# Altium PCB Arduino_FPGA_Shield.PcbDoc (part 1 of 2)
Units mil, origin at the board's own origin, x right, y up, seen from the top; angles counter-clockwise.
Board outline 2700 x 2100 mil, 4 copper layers (Top, PWR, GND, Bottom), stack 79.645 mil thick; 88 components, 145 nets, 490 pads, 201 vias.
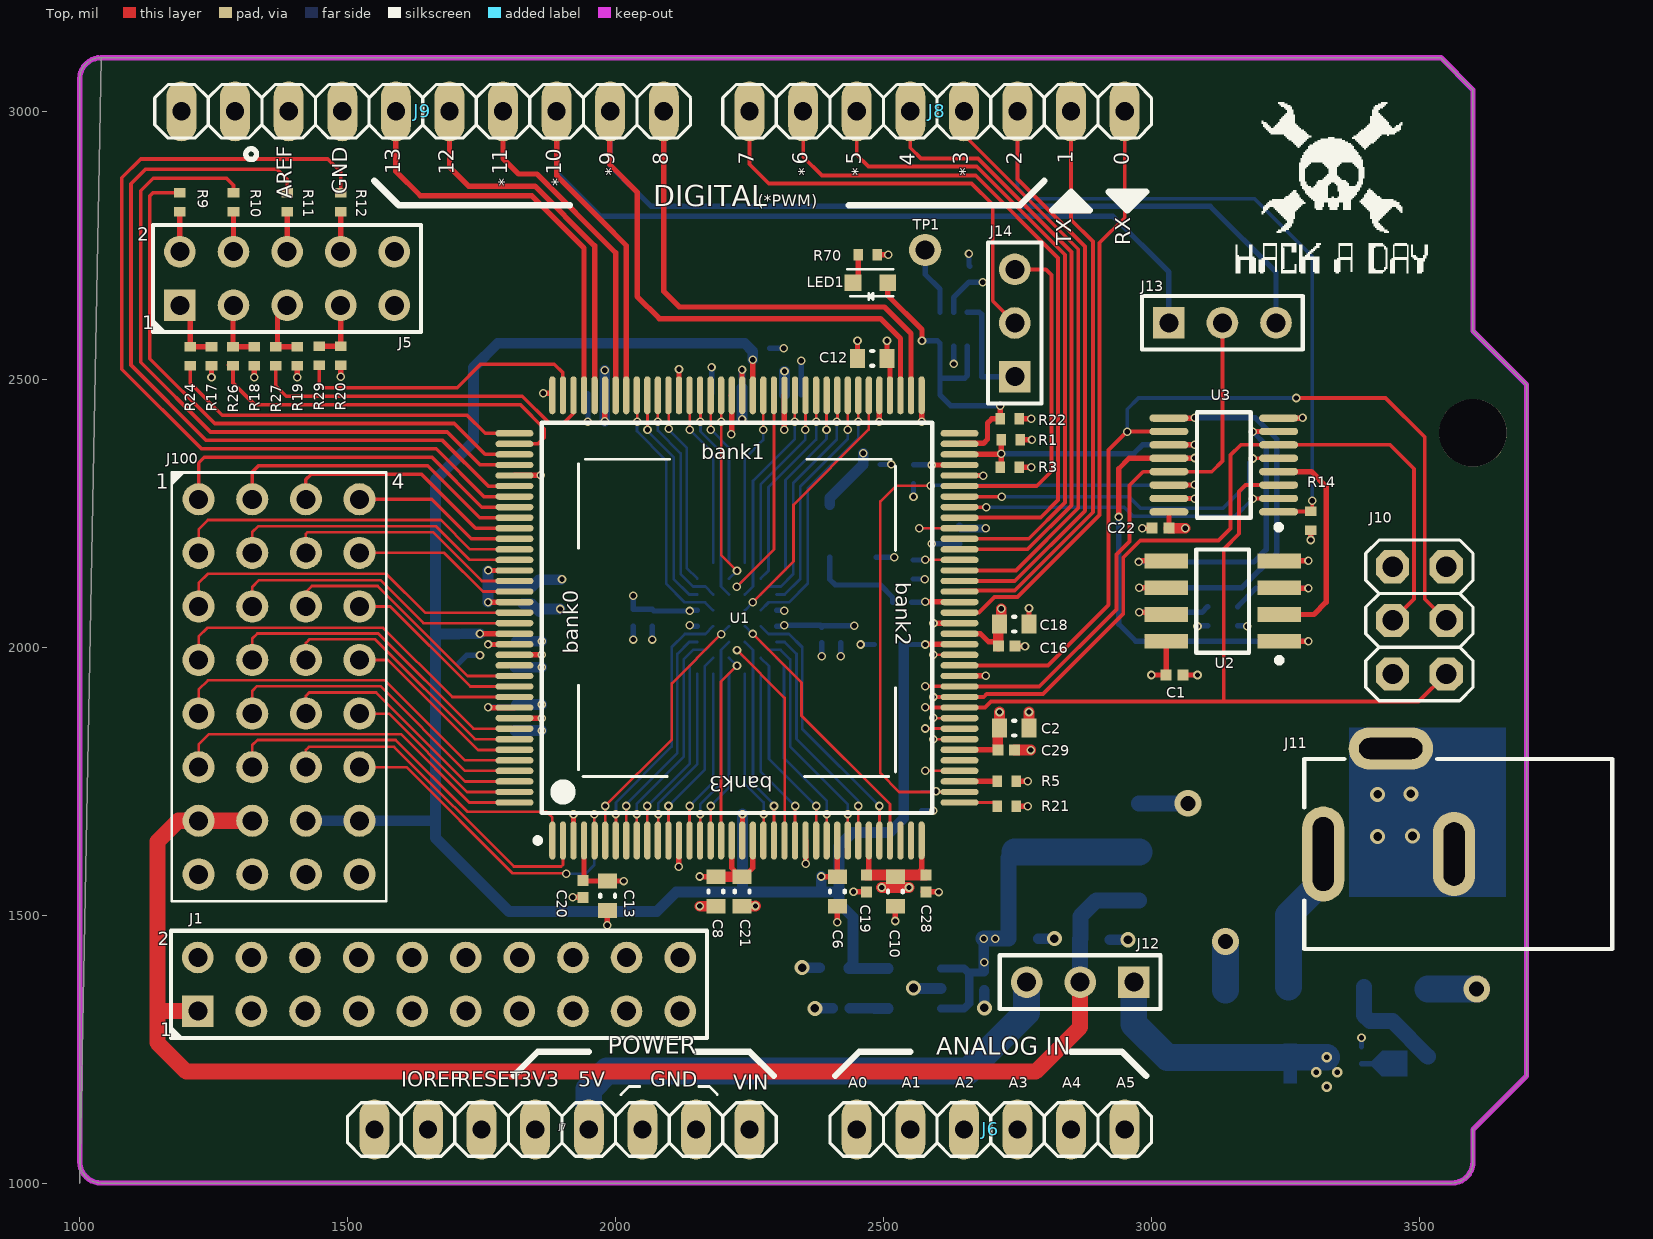
[diagram p0: Top view]
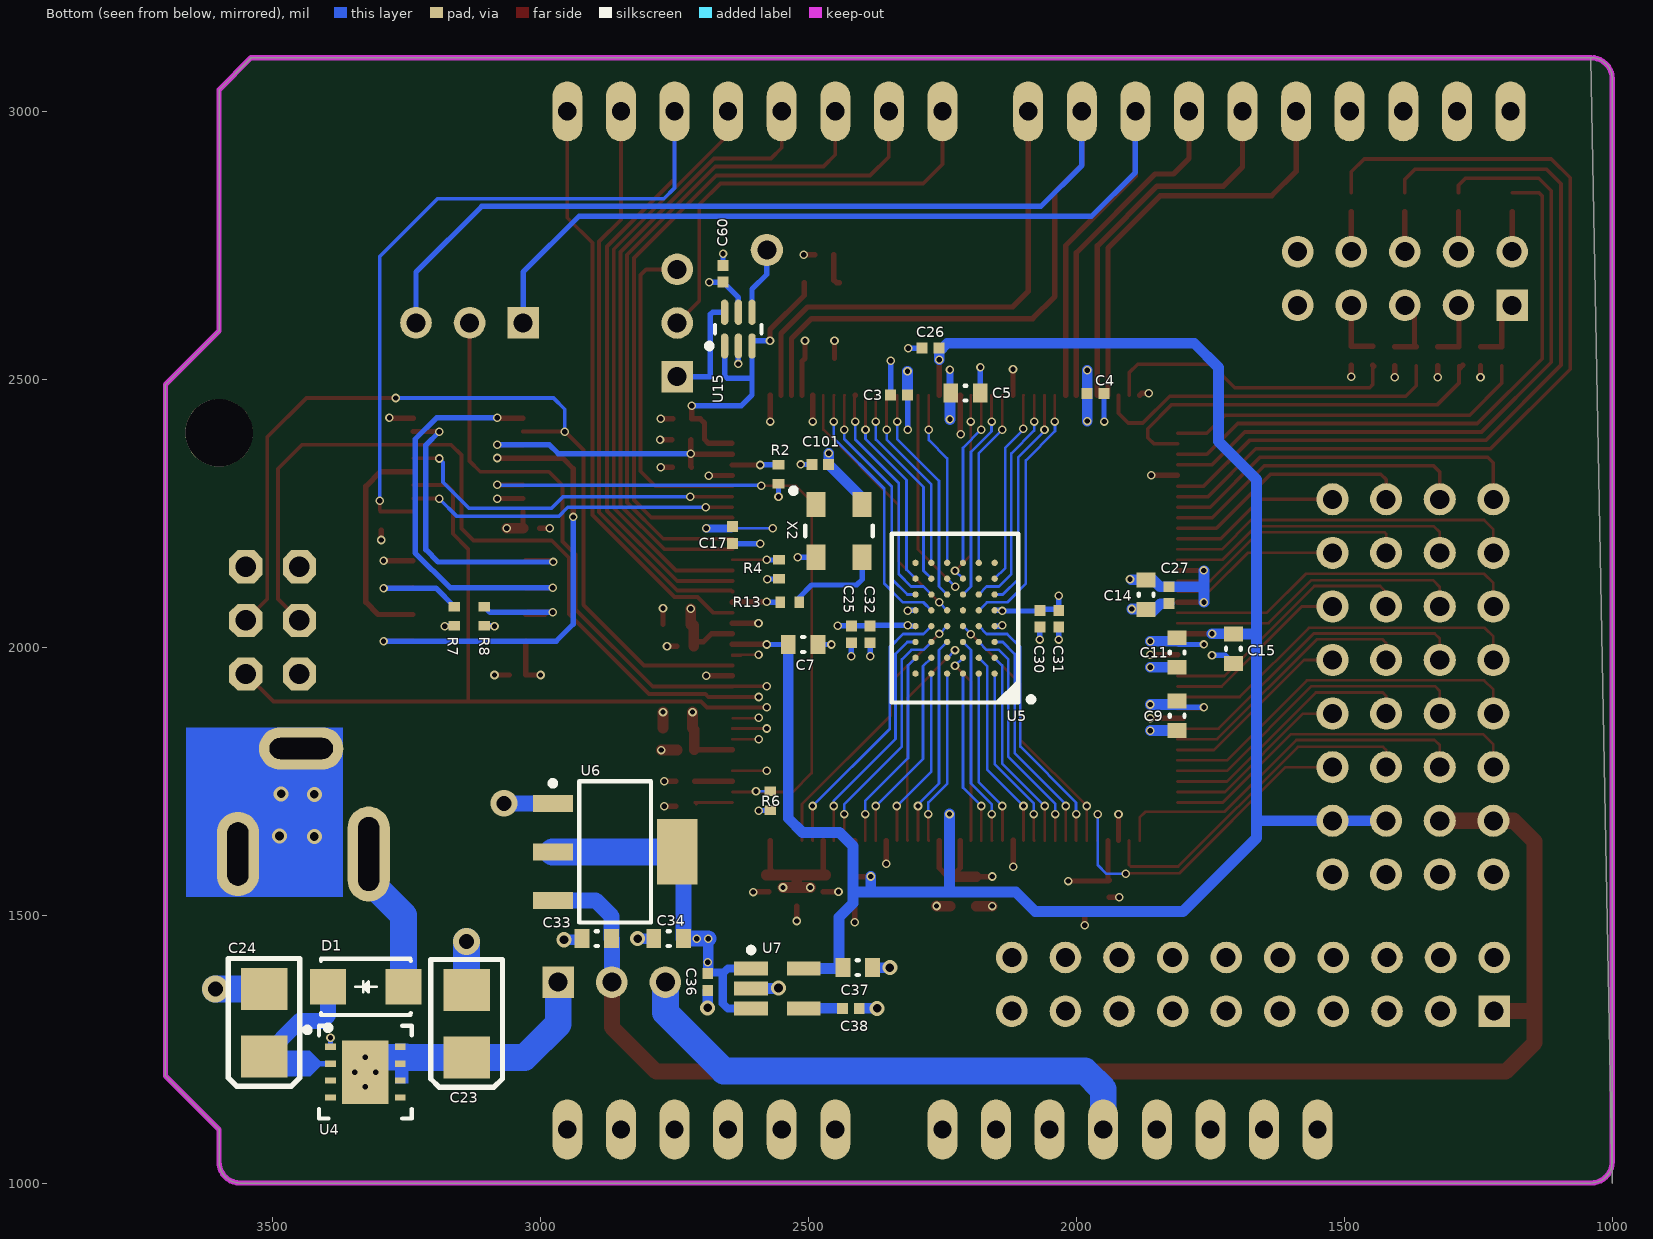
[diagram p1: Bottom view, seen from below]
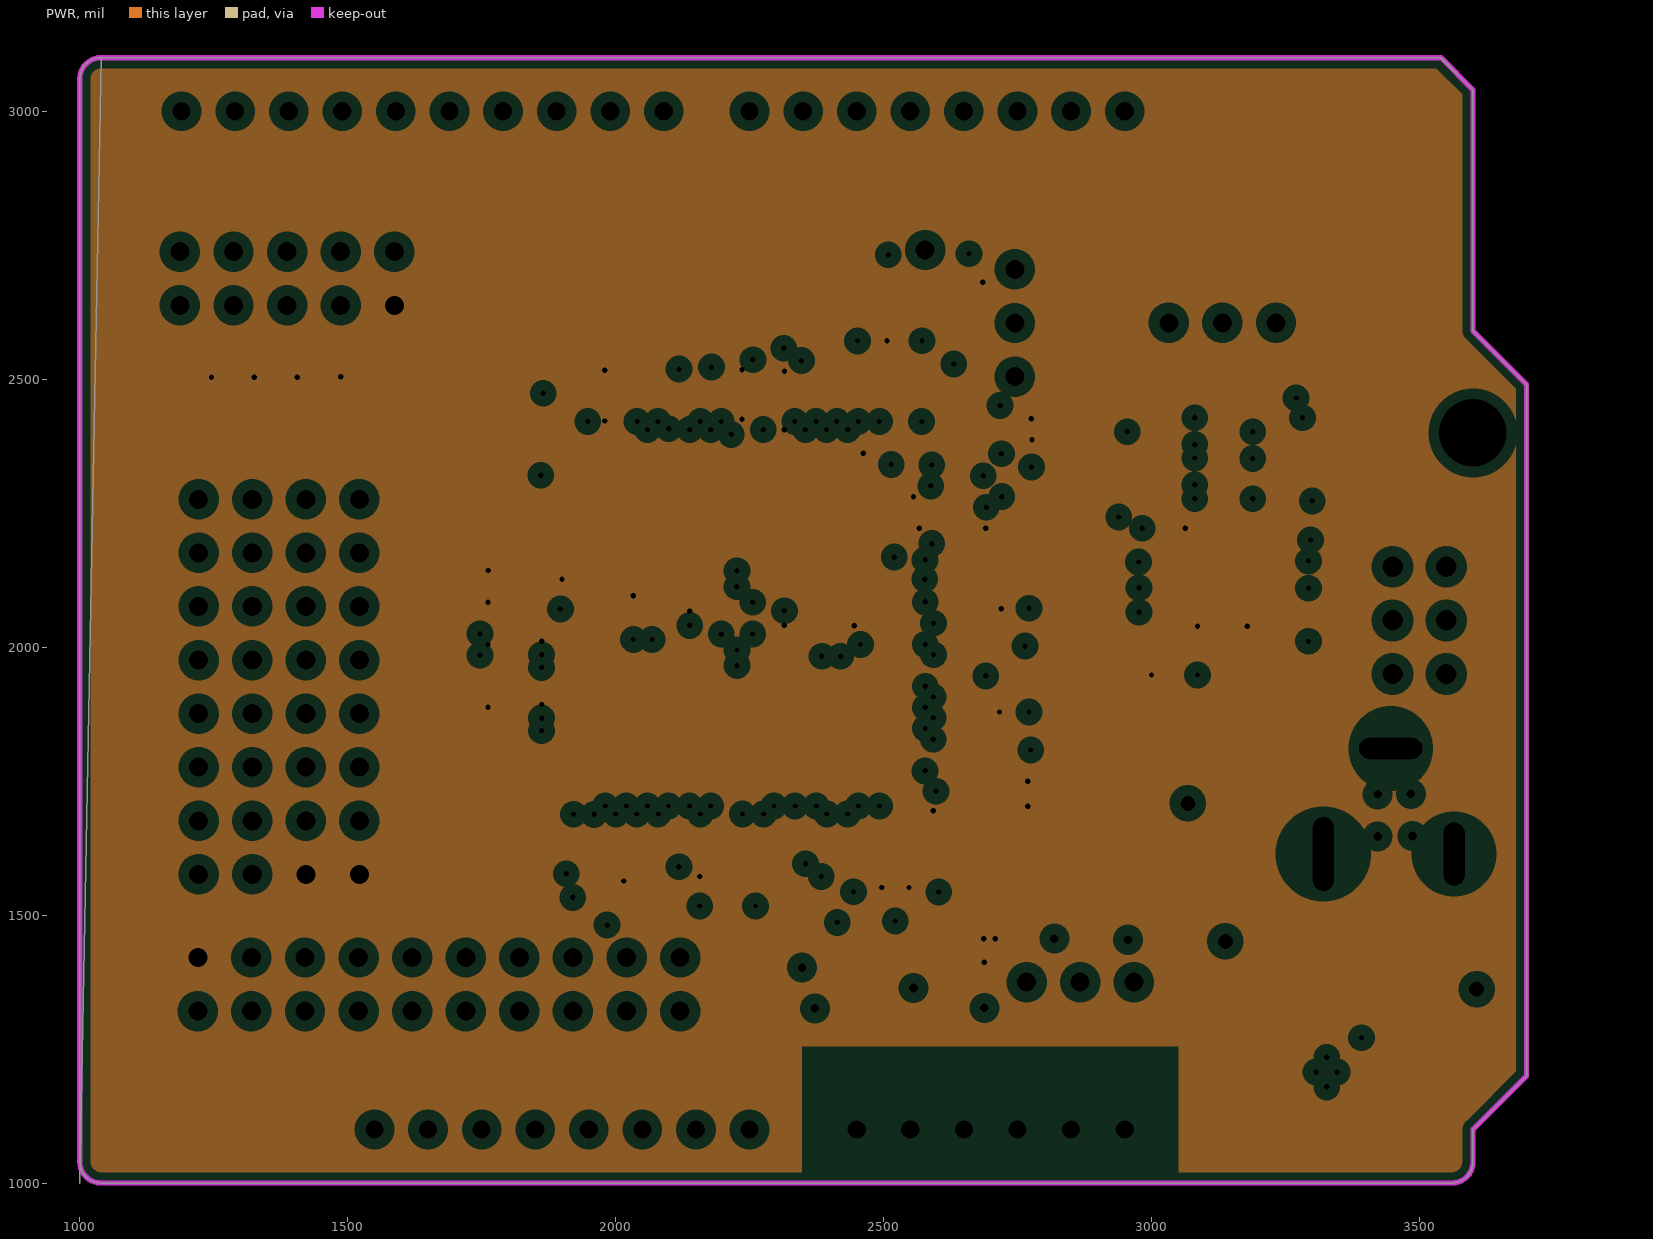
[diagram p2: PWR, clearances drawn from the general rule]
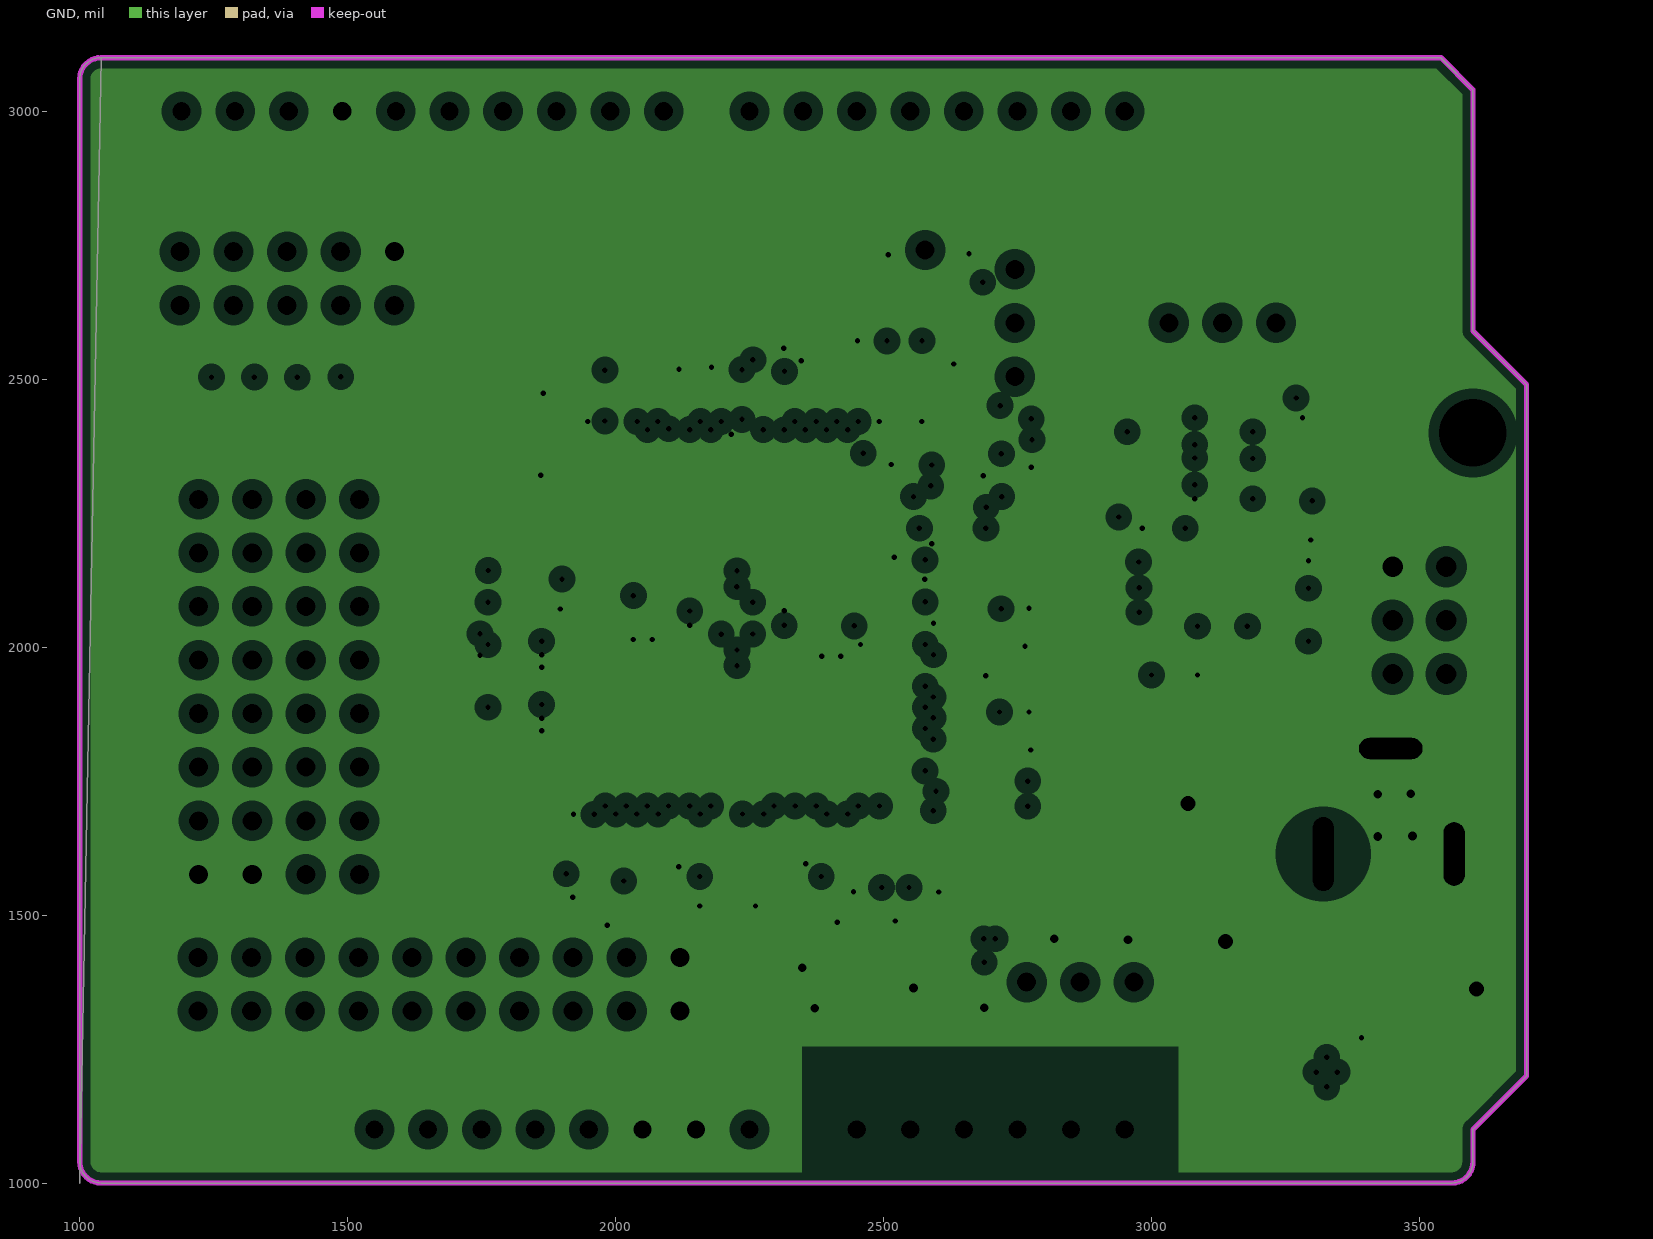
[diagram p3: GND, clearances drawn from the general rule]

## Layer stack, top to bottom
Top Solder: solder mask 0.4, Solder Resist, Dk 3.5
Top: signal copper 1.378
Dielectric 1: core 59.055, FR-4, Dk 4.8
PWR: plane copper 1.417, net 3V3
Dielectric 4: prepreg 5, Dk 4.2
GND: plane copper 1.417, net GND
Dielectric 2: core 10, Dk 4.2
Bottom: signal copper 1.378
Bottom Solder: solder mask 0.4, Solder Resist, Dk 3.5

## Board outline
1040,3100 3540,3100 3600,3040 3600,2590 3700,2490 3700,1200 3600,1100 3600,1040 cw(c3560.5,1039.5) 3561,1000 1040,1000 cw(c1040,1040) 1000,1040 1000,3061 cw(c1039.5,3060.5) 1000,1000

## Design rules (kind name [scope] priority, off if disabled: settings)
Clearance [All] p1: gap=5.39
HoleSize [All] p1: absolutevalues=TRUE maxlimit=100000 minlimit=7 maxpercent=80.000 minpercent=20.000
HoleToHoleClearance [All] p1: gap=8 allowstackedmicrovias=TRUE
MinimumSolderMaskSliver [All] p1 off: minsoldermaskwidth=10
PasteMaskExpansion [All] p1: expansion=2
PlaneClearance [All] p1: clearance=20
PlaneConnect PlaneConnect_1 [IsVia And (AsMM(ViaDiameter) = 0.405)] p1: planeconnectstyle=NoConnect reliefexpansion=20 reliefentries=4 reliefconductorwidth=10 reliefairgap=10
PlaneConnect [All] p2: planeconnectstyle=Relief reliefexpansion=20 reliefentries=4 reliefconductorwidth=10 reliefairgap=10
PolygonConnect ThermalVias [IsVia] p1: connectstyle=Direct reliefconductorwidth=10 reliefentries=4 polygonreliefangle="90 Angle" airgapwidth=10
PolygonConnect [All] p2: connectstyle=Relief reliefconductorwidth=10 reliefentries=4 polygonreliefangle="90 Angle" airgapwidth=10
RoutingVias [All] p1: holewidth=10 width=16 viastyle="Through Hole" minholewidth=10 minwidth=16 maxholewidth=28 maxwidth=48
SilkToBoardRegionClearance [All] p1 off:
SilkToSilkClearance [All] p1 off: silktosilkclearance=10
SilkToSolderMaskClearance [IsPad] p1 off: minsilkscreentomaskgap=10 clearancetoexposedcopper=TRUE
SolderMaskExpansion [All] p1: expansion=1
Width POWER [InNetClass('POWER')] p1: maxlimit=100 minlimit=10 preferedwidth=10
Width [All] p2: maxlimit=100 minlimit=5 preferedwidth=5
20 further rules are at their usual default settings.

## Classes and differential pairs
component class LEDS: C60 LED1 R70 U15
component class "Power - 1V2": C36 C37 C38 U7
component class "ARDUINO FPGA DESIGN": C101 R13 R14 X2
component class FPGA_SUBSYSTEM: R1 R2 R3 R4 R5 R6 R9 R10 R11 R12 R17 R18 R19 R20 R21 R22 R24 R26 R27 R29 U1
component class "U_FPGA - Decoupling": C2 C3 C4 C5 C6 C7 C8 C9 C10 C11 C12 C13 C14 C15 C16 C17 C18 C19 C20 C21 C26 C27 C28 C29
component class "Arduino FPGA Top-Level Interface": J1 J5 J6 J7 J8 J9 J10 J13 J14 J100 TP1
component class POWER: C23 C24 D1 J11 J12 U4
component class FLASH_MEMORY: C1 R7 R8 U2
component class "SPI MUX": C22 U3
component class SRAM0: C25 C30 C31 C32 U5
net class SRAM0_A[17..0]: SRAM0_A0 SRAM0_A1 SRAM0_A2 SRAM0_A3 SRAM0_A4 SRAM0_A5 SRAM0_A6 SRAM0_A7 SRAM0_A8 SRAM0_A9 SRAM0_A10 SRAM0_A11 SRAM0_A12 SRAM0_A13 SRAM0_A14 SRAM0_A15 SRAM0_A16 SRAM0_A17
net class SRAM0_D[15..0]: SRAM0_D0 SRAM0_D1 SRAM0_D2 SRAM0_D3 SRAM0_D4 SRAM0_D5 SRAM0_D6 SRAM0_D7 SRAM0_D8 SRAM0_D9 SRAM0_D10 SRAM0_D11 SRAM0_D12 SRAM0_D13 SRAM0_D14 SRAM0_D15
component class "Power - 3V3": C33 C34 U6

## Components (designator, comment, footprint, x,y, rotation, side; value= is the part's Value field where it differs from the comment)
C1 "CAP 100nF 16V 0402(1005)" CAPC0402(1005)60_L 3043,1948 r0 top
C2 "CAP 4.7uF 10V 0603(1608)" CAPC0603(1608)55_L 2744,1849 r0 top
C3 "CAP 470nF 10V 0402(1005)" CAPC0402(1005)60_L 2331,2471 r180 bottom
C4 "CAP 470nF 10V 0402(1005)" CAPC0402(1005)60_L 1964.25,2473.35 r0 bottom
C5 "CAP 4.7uF 10V 0603(1608)" CAPC0603(1608)55_L 2207,2474 r180 bottom
C6 "CAP 4.7uF 10V 0603(1608)" CAPC0603(1608)55_L 2414,1544 r270 top
C7 "CAP 4.7uF 10V 0603(1608)" CAPC0603(1608)55_L 2510,2005 r180 bottom
C8 "CAP 4.7uF 10V 0603(1608)" CAPC0603(1608)55_L 2187,1544 r270 top
C9 "CAP 4.7uF 10V 0603(1608)" CAPC0603(1608)55_L 1812,1872 r270 bottom
C10 "CAP 4.7uF 10V 0603(1608)" CAPC0603(1608)55_L 2522,1544 r270 top
C11 "CAP 4.7uF 10V 0603(1608)" CAPC0603(1608)55_L 1812,1990 r270 bottom
C12 "CAP 4.7uF 10V 0603(1608)" CAPC0603(1608)55_L 2479,2539 r180 top
C13 "CAP 4.7uF 10V 0603(1608)" CAPC0603(1608)55_L 1985,1536 r270 top
C14 "CAP 4.7uF 10V 0603(1608)" CAPC0603(1608)55_L 1870,2098 r90 bottom
C15 "CAP 4.7uF 10V 0603(1608)" CAPC0603(1608)55_L 1707,1997 r270 bottom
C16 "CAP 470nF 10V 0402(1005)" CAPC0402(1005)60_L 2730,2002 r180 top
C17 "CAP 470nF 10V 0402(1005)" CAPC0402(1005)60_L 2642,2209 r90 bottom
C18 "CAP 4.7uF 10V 0603(1608)" CAPC0603(1608)55_L 2744,2043 r180 top
C19 "CAP 470nF 10V 0402(1005)" CAPC0402(1005)60_L 2468,1559 r90 top
C20 "CAP 470nF 10V 0402(1005)" CAPC0402(1005)60_L 1939,1549 r90 top
C21 "CAP 4.7uF 10V 0603(1608)" CAPC0603(1608)55_L 2236,1544 r90 top
C22 "CAP 100nF 16V 0402(1005)" CAPC0402(1005)60_L 3017,2222 r180 top
C23 "TAJB106K020R" AVX-CAPC3528_V 3138,1297 r90 bottom
C24 "TAJB106K020R" AVX-CAPC3528_V 3516,1299 r90 bottom
C25 "CAP 100nF 16V 0402(1005)" CAPC0402(1005)60_L 2420,2024 r270 bottom
C26 "CAP 470nF 10V 0402(1005)" CAPC0402(1005)60_L 2272,2558 r0 bottom
C27 "CAP 470nF 10V 0402(1005)" CAPC0402(1005)60_L 1827,2097 r270 bottom
C28 "CAP 470nF 10V 0402(1005)" CAPC0402(1005)60_L 2579,1559 r90 top
C29 "CAP 470nF 10V 0402(1005)" CAPC0402(1005)60_L 2729,1808 r180 top
C30 "CAP 100nF 16V 0402(1005)" CAPC0402(1005)60_L 2068,2053 r270 bottom
C31 "CAP 10nF 16V 0402(1005)" CAPC0402(1005)33_L 2033,2053 r270 bottom
C32 "CAP 10nF 16V 0402(1005)" CAPC0402(1005)33_L 2385,2024 r270 bottom
C33 "CAP 4.7uF 10V 0603(1608)" CAPC0603(1608)55_L 2895,1456 r0 bottom
C34 "CAP 4.7uF 10V 0603(1608)" CAPC0603(1608)55_L 2761,1456 r0 bottom
C36 "CAP 1uF 16V 0402(1005)" CAPC0402(1005)60_L 2688,1375 r90 bottom
C37 "CAP 2.2uF 16V 0603(1608)" CAPC0603(1608)55_L 2408,1402 r0 bottom
C38 "CAP 10nF 16V 0402(1005)" CAPC0402(1005)33_L 2421,1326 r0 bottom
C60 "CAP 100nF 10V 0402(1005)" CAPC0402(1005)60_L 2659.45,2696.85 r270 bottom
C101 "CAP 100nF 16V 0402(1005)" CAPC0402(1005)60_L 2478,2341 r0 bottom
D1 "S1G" DO-214AC 3326,1366 r0 bottom
J1 "Header 10X2" HEADER_10X2 1220.47,1318.9 r0 top
J5 "Header 5X2" HDR2X5 1187,2638 r0 top
J6 "Header 6" 1X06 2700,1100 r0 top
J7 "Header 8" 1X08 1900,1100 r0 top
J8 "Header 8" 1X08 2600,3000 r180 top
J9 "Header 10" 1X10@1 1640,3000 r180 top
J10 "Header 3X2" 2X03 3500,2050 r90 top
J11 "PWR CONNECTOR" KLD-0202 3860,1614 r180 top
J12 "3-WAY JUMPER" HDR1X3 2967,1375 r180 top
J13 "3-WAY JUMPER" HDR1X3 3032.48,2605.32 r0 top
J14 "3-WAY JUMPER" HDR1X3 2745.08,2504.92 r90 top (schematic designator J13)
J100 "ARR_32P" ARR_100X100X32P 1222,2276 r0 top
LED1 "LED_GREEN_APT1608SGC" LED0603 2507.87,2680.12 r180 top
R1 "100R 1 0402" RESC0402(1005)40_L 2737,2387 r0 top
R2 "4K7 1 0402" RESC0402(1005)40_L 2556,2323 r270 bottom
R3 "100R 1 0402" RESC0402(1005)40_L 2736,2336 r180 top
R4 "1K 1 0402" RESC0402(1005)40_L 2555,2145 r90 bottom
R5 "4K7 1 0402" RESC0402(1005)40_L 2730,1750 r0 top
R6 "4K7 1 0402" RESC0402(1005)40_L 2571,1713 r270 bottom
R7 "4K7" RESC0402(1005)40_L 3161,2058 r270 bottom
R8 "4K7" RESC0402(1005)40_L 3105,2058 r270 bottom
R9 "33R 1 0402" RESC0402(1005)40_L 1187,2830 r90 top
R10 "33R 1 0402" RESC0402(1005)40_L 1287,2830 r90 top
R11 "33R 1 0402" RESC0402(1005)40_L 1387,2830 r90 top
R12 "33R 1 0402" RESC0402(1005)40_L 1487,2830 r90 top
R13 "33R 1 0402" RESC0402(1005)40_L 2535,2084 r180 bottom
R14 "4K7 1 0402" RESC0402(1005)40_L 3297,2236 r90 top
R17 "4K7 1 0402" RESC0402(1005)40_L 1246,2543 r270 top
R18 "4K7 1 0402" RESC0402(1005)40_L 1326,2543 r270 top
R19 "4K7 1 0402" RESC0402(1005)40_L 1406,2542.72 r270 top
R20 "4K7 1 0402" RESC0402(1005)40_L 1487,2543.72 r270 top
R21 "4K7 1 0402" RESC0402(1005)40_L 2730,1703 r0 top
R22 "330R 1 0402" RESC0402(1005)40_L 2735.72,2426 r0 top
R24 "33R 1 0402" RESC0402(1005)40_L 1206,2543 r270 top
R26 "33R 1 0402" RESC0402(1005)40_L 1286,2543 r270 top
R27 "33R 1 0402" RESC0402(1005)40_L 1366,2542.72 r270 top
R29 "33R 1 0402" RESC0402(1005)40_L 1447,2543.72 r270 top
R70 "56R 1% 0402(1005)" RESC0402(1005)_L 2470.47,2732.28 r0 top
TP1 "TESTPOINT_TH" TESTPOINT_TH 2577.76,2741.14 r0 top
U1 "XC6SLX9-2TQG144C" TQG144_N 2226.59,2054.59 r90 top
U2 "S25FL216K0PMFI041" SPANSION-SOIC127P600X175-8M 3133,2086 r180 top
U3 "SN74CBTLV3257DBQR" TI-DBQ16_N 3135,2340 r180 top
U4 "LM1086ILD-3.3/NOPB" LDC08A 3327,1207 r180 bottom
U5 "IS61WV12816DBLL-10BLI" ISSI-TF-BGA-48-6000X8000DE 2226.47,2054 r0 bottom
U6 "AP2114H-3.3TRG1" SOT230P700X180-4L 2861,1618 r180 bottom
U7 "CAT6219-125TDGT3" ONSC-SOT23-5_M 2558,1363 r180 bottom
U15 "SN74LVC2G34DCKR" TI-DCK6_L 2630.91,2593.5 r90 bottom
X2 "KC5032A20.0000CM0E00" HOSC-L500HW320H105-4_2 2443,2217 r270 bottom

## Footprints (in the part's own frame and the unit in brackets; to place one, negate y for a bottom-side part, rotate by r counter-clockwise, add the part's x,y. Pads: shape width x height; smd on the part's side, far side on the other; paste and mask are expansions set on the pad)
1X06 [mil] "1X06"
  oval 56x112 hole 34: 1(-250,0) 2(-150,0) 3(-50,0) 4(50,0) 5(150,0) 6(250,0)
  silkscreen extent -300,-50 300,50
1X08 [mil] "1X08"
  oval 56x112 hole 34: 1(-350,0) 2(-250,0) 3(-150,0) 4(-50,0) 5(50,0) 6(150,0) 7(250,0) 8(350,0)
  silkscreen extent -400,-50 400,50
1X10@1 [mil] "1X10@1"
  oval 56x112 hole 34: 1(-450,0) 2(-350,0) 3(-250,0) 4(-150,0) 5(-50,0) 6(50,0) 7(150,0) 8(250,0) 9(350,0) 10(450,0)
  silkscreen extent -500,-50 500,50
2X03 [mil] "2X03"
  oct 62x62 hole 38: 1(-100,-50) 2(-100,50) 3(0,-50) 4(0,50) 5(100,-50) 6(100,50)
  silkscreen extent -150,-100 150,100
ARR_100X100X32P [mil] "100X100mil 32 PIN ARRAY OF PADS"
  round 60 hole 35.5: 1(0,0) 2(100,0) 3(200,0) 4(300,0) 5(0,-100) 6(100,-100) 7(200,-100) 8(300,-100) 9(0,-200) 10(100,-200) 11(200,-200) 12(300,-200) 13(0,-300) 14(100,-300) 15(200,-300) 16(300,-300) 17(0,-400) 18(100,-400) 19(200,-400) 20(300,-400) 21(0,-500) 22(100,-500) 23(200,-500) 24(300,-500) 25(0,-600) 26(100,-600) 27(200,-600) 28(300,-600) 29(0,-700) 30(100,-700) 31(200,-700) 32(300,-700)
  silkscreen extent -50,-750 350,50
AVX-CAPC3528_V [mm] "SMT Capacitor, 2 Leads, Body 3.5x2.8mm"
  rect 2x2.2 smd: 1(-1.6,0) 2(1.6,0)
  silkscreen extent -3,-1.7 3.05,1.7, body extent -1.79,-1.54 1.8,1.54, height 1.9
CAPC0402(1005)33_L [mm] "Chip Capacitor, Body 1.0x0.5mm, Height 0.33mm, IPC High Density"
  rect 0.52x0.52 smd: 1(-0.4,0) 2(0.4,0)
  body extent -0.55,-0.3 0.55,0.3, height 0.33
CAPC0402(1005)60_L [mm] "Chip Capacitor, Body 1.0x0.5mm, Height 0.6mm, IPC High Density"
  rect 0.52x0.52 smd: 1(-0.4,0) 2(0.4,0)
  body extent -0.55,-0.3 0.55,0.3, height 0.6
CAPC0603(1608)55_L [mm] "Chip Capacitor, Body 1.6x0.8mm, Height 0.55mm, IPC High Density"
  rect 0.7x0.9 smd: 1(-0.7,0) 2(0.7,0)
  silkscreen extent -0.05,-0.35 0.05,0.35, body extent -0.87,-0.47 0.88,0.48, height 0.55
DO-214AC [mm] "SMA, 2-Leads, Body 4.245x2.665mm, Height 2.29mm"
  rect 1.7x1.68 smd: 1(-1.79,0) 2(1.79,0)
  silkscreen extent -2.12,-1.33 2.12,2.06, body extent -2.57,-1.33 2.57,1.33, height 2.29
HDR1X3 [mm] "Connector; Header; 3 Position"
  rect 1.5x1.5 hole 0.9: 1(0,0)
  round 1.5 hole 0.9: 2(2.54,0) 3(5.08,0)
  silkscreen extent -1.27,-1.27 6.35,1.27
HDR2X5 [mm] "Connector; Header; 5x2 Position"
  rect 1.5x1.5 hole 0.9: 1(0,0)
  round 1.5 hole 0.9: 2(0,2.54) 3(2.54,0) 4(2.54,2.54) 5(5.08,0) 6(5.08,2.54) 7(7.62,0) 8(7.62,2.54) 9(10.16,0) 10(10.16,2.54)
  silkscreen extent -1.27,-1.27 11.43,3.81
HEADER_10X2 [mm]
  rect 1.5x1.5 hole 0.9: 1(0,0.051)
  round 1.5 hole 0.9: 2(0,2.591) 3(2.54,0.051) 4(2.54,2.591) 5(5.08,0.051) 6(5.08,2.591) 7(7.62,0.051) 8(7.62,2.591) 9(10.16,0.051) 10(10.16,2.591) 11(12.7,0.051) 12(12.7,2.591) 13(15.24,0.051) 14(15.24,2.591) 15(17.78,0.051) 16(17.78,2.591) 17(20.32,0.051) 18(20.32,2.591) 19(22.86,0.051) 20(22.86,2.591)
  silkscreen extent -1.27,-1.22 24.13,3.86
HOSC-L500HW320H105-4_2 [mm] "Quartz Crystal, Body 5.0 x 3.2 mm, Height 1.05mm"
  rect 1.2x0.9 smd: 1(-1.25,-1.1) 2(1.25,-1.1) 3(1.25,1.1) 4(-1.25,1.1)
  silkscreen extent -2.03,-2.28 0.25,1.6, body extent -2.5,-1.6 2.5,1.6, height 1.05
ISSI-TF-BGA-48-6000X8000DE [mm] "BGA, 48-Balls, Body 8x6mm, Pitch 0.75mm"
  round 0.3 smd: A1(-1.875,2.625) A2(-1.125,2.625) A3(-0.375,2.625) A4(0.375,2.625) A5(1.125,2.625) A6(1.875,2.625) B1(-1.875,1.875) B2(-1.125,1.875) B3(-0.375,1.875) B4(0.375,1.875) B5(1.125,1.875) B6(1.875,1.875) C1(-1.875,1.125) C2(-1.125,1.125) C3(-0.375,1.125) C4(0.375,1.125) C5(1.125,1.125) C6(1.875,1.125) D1(-1.875,0.375) D2(-1.125,0.375) D3(-0.375,0.375) D4(0.375,0.375) D5(1.125,0.375) D6(1.875,0.375) E1(-1.875,-0.375) E2(-1.125,-0.375) E3(-0.375,-0.375) E4(0.375,-0.375) E5(1.125,-0.375) E6(1.875,-0.375) F1(-1.875,-1.125) F2(-1.125,-1.125) F3(-0.375,-1.125) F4(0.375,-1.125) F5(1.125,-1.125) F6(1.875,-1.125) G1(-1.875,-1.875) G2(-1.125,-1.875) G3(-0.375,-1.875) G4(0.375,-1.875) G5(1.125,-1.875) G6(1.875,-1.875) H1(-1.875,-2.625) H2(-1.125,-2.625) H3(-0.375,-2.625) H4(0.375,-2.625) H5(1.125,-2.625) H6(1.875,-2.625)
  silkscreen extent -3.72,-4 3,4, body extent -3,-4 3,4, height 1.2
KLD-0202 [mm] "DC Power Jack, 2.5mm, KLD Series, PCB Mount"
  oval 2x4.5 hole 1 slot 3.5 at 90 deg: 1(13.7,0)
  oval 2x4 hole 1 slot 3 at 90 deg: 2(7.5,0)
  oval 4x2 hole 1 slot 3 at 0 deg: 3(10.5,-5)
  silkscreen extent 0,-4.5 14.6,4.5
LDC08A [mm] "PSON, 8-Leads, Body 4x4mm, Pitch 0.8mm, NSC Recommended"
  rect 0.5x0.3 smd paste-0.15 mask+0.051: 1(-1.65,1.2) 2(-1.65,0.4) 3(-1.65,-0.4) 4(-1.65,-1.2) 5(1.65,-1.2) 6(1.65,-0.4) 7(1.65,0.4) 8(1.65,1.2)
  rect 2.2x3 smd paste-1.5 mask+0.051: 9(0,0)
  silkscreen extent -2.88,-2.2 2.2,2.2, body extent -2.05,-2.05 2.05,2.05, height 0.8
LED0603 [mm]
  rect 0.8x0.8 smd: 1(0,0) 2(1.651,0)
  silkscreen extent -0.25,-0.64 1.91,0.8
ONSC-SOT23-5_M [mm] "SOT23, 5-Leads, Body 2.90x1.6mm, Pitch 0.95mm, IPC Low Density"
  rect 1.6x0.65 smd: 1(-1.25,0.95) 2(-1.25,0) 3(-1.25,-0.95) 4(1.25,-0.95) 5(1.25,0.95)
  silkscreen extent -1.38,1.7 -1.13,1.95, body extent -0.8,-1.45 0.8,1.45, height 1
RESC0402(1005)40_L [mm] "Chip Resistor, Body 1.0x0.5mm, IPC High Density"
  rect 0.45x0.55 smd: 1(-0.45,0) 2(0.45,0)
  body extent -0.52,-0.27 0.53,0.28, height 0.4
RESC0402(1005)_L [mm] "Chip Resistor, Body 1.0x0.5mm, IPC High Density"
  rect 0.45x0.55 smd: 1(-0.45,0) 2(0.45,0)
  body extent -0.52,-0.27 0.53,0.28, height 0.4
SOT230P700X180-4L [mm] "SOT223, 4-Leads, Body 6.50x7.00mm (avg), Pitch 2.30mm, IPC High Density"
  rect 1.9x0.8 smd: 1(-2.95,2.3) 2(-2.95,0) 3(-2.95,-2.3)
  rect 1.9x3.1 smd: 4(2.95,0)
  silkscreen extent -3.08,-3.35 1.7,3.37, body extent -1.85,-3.35 1.85,3.35, height 1.8
SPANSION-SOIC127P600X175-8M [mm] "SOIC, 8-Leads, Body 4.90x3.95mm, Pitch 1.27mm, IPC Low Density"
  rect 2.05x0.7 smd: 1(-2.675,1.905) 2(-2.675,0.635) 3(-2.675,-0.635) 4(-2.675,-1.905) 5(2.675,-1.905) 6(2.675,-0.635) 7(2.675,0.635) 8(2.675,1.905)
  silkscreen extent -2.8,-2.45 1.25,2.93, body extent -2,-2.45 2,2.45, height 1.75
TESTPOINT_TH [mil]
  round 60 hole 35.5: 1(0,0)
TI-DBQ16_N [mm] "SOP, 16-Leads, Body 4.9x3.9mm, Pitch 0.635mm, IPC Medium Density"
  oval 1.85x0.35 smd: 1(-2.6,2.222) 2(-2.6,1.587) 3(-2.6,0.952) 4(-2.6,0.317) 5(-2.6,-0.318) 6(-2.6,-0.953) 7(-2.6,-1.588) 8(-2.6,-2.223) 9(2.6,-2.222) 10(2.6,-1.587) 11(2.6,-0.952) 12(2.6,-0.317) 13(2.6,0.318) 14(2.6,0.953) 15(2.6,1.588) 16(2.6,2.223)
  silkscreen extent -2.73,-2.5 1.28,3.07, body extent -2,-2.5 2,2.5, height 1.75
TI-DCK6_L [mm] "SOP, 6-Leads, Body 2x1.25mm, Pitch 0.65mm, IPC High Density"
  oval 1.2x0.35 smd: 1(-0.8,0.65) 2(-0.8,0) 3(-0.8,-0.65) 4(0.8,-0.65) 5(0.8,0) 6(0.8,0.65)
  silkscreen extent -0.92,-1.1 0.2,1.5, body extent -0.7,-1.1 0.7,1.1, height 1.1
TQG144_N [mm] "Thin QFP, 144-Leads, Body 20x20mm, Pitch 0.5mm, IPC Medium Density"
  oval 1.8x0.3 smd: 1(-10.55,8.75) 2(-10.55,8.25) 3(-10.55,7.75) 4(-10.55,7.25) 5(-10.55,6.75) 6(-10.55,6.25) 7(-10.55,5.75) 8(-10.55,5.25) 9(-10.55,4.75) 10(-10.55,4.25) 11(-10.55,3.75) 12(-10.55,3.25) 13(-10.55,2.75) 14(-10.55,2.25) 15(-10.55,1.75) 16(-10.55,1.25) 17(-10.55,0.75) 18(-10.55,0.25) 19(-10.55,-0.25) 20(-10.55,-0.75) 21(-10.55,-1.25) 22(-10.55,-1.75) 23(-10.55,-2.25) 24(-10.55,-2.75) 25(-10.55,-3.25) 26(-10.55,-3.75) 27(-10.55,-4.25) 28(-10.55,-4.75) 29(-10.55,-5.25) 30(-10.55,-5.75) 31(-10.55,-6.25) 32(-10.55,-6.75) 33(-10.55,-7.25) 34(-10.55,-7.75) 35(-10.55,-8.25) 36(-10.55,-8.75) 73(10.55,-8.75) 74(10.55,-8.25) 75(10.55,-7.75) 76(10.55,-7.25) 77(10.55,-6.75) 78(10.55,-6.25) 79(10.55,-5.75) 80(10.55,-5.25) 81(10.55,-4.75) 82(10.55,-4.25) 83(10.55,-3.75) 84(10.55,-3.25) 85(10.55,-2.75) 86(10.55,-2.25) 87(10.55,-1.75) 88(10.55,-1.25) 89(10.55,-0.75) 90(10.55,-0.25) 91(10.55,0.25) 92(10.55,0.75) 93(10.55,1.25) 94(10.55,1.75) 95(10.55,2.25) 96(10.55,2.75) 97(10.55,3.25) 98(10.55,3.75) 99(10.55,4.25) 100(10.55,4.75) 101(10.55,5.25) 102(10.55,5.75) 103(10.55,6.25) 104(10.55,6.75) 105(10.55,7.25) 106(10.55,7.75) 107(10.55,8.25) 108(10.55,8.75)
  oval 0.3x1.8 smd: 37(-8.75,-10.55) 38(-8.25,-10.55) 39(-7.75,-10.55) 40(-7.25,-10.55) 41(-6.75,-10.55) 42(-6.25,-10.55) 43(-5.75,-10.55) 44(-5.25,-10.55) 45(-4.75,-10.55) 46(-4.25,-10.55) 47(-3.75,-10.55) 48(-3.25,-10.55) 49(-2.75,-10.55) 50(-2.25,-10.55) 51(-1.75,-10.55) 52(-1.25,-10.55) 53(-0.75,-10.55) 54(-0.25,-10.55) 55(0.25,-10.55) 56(0.75,-10.55) 57(1.25,-10.55) 58(1.75,-10.55) 59(2.25,-10.55) 60(2.75,-10.55) 61(3.25,-10.55) 62(3.75,-10.55) 63(4.25,-10.55) 64(4.75,-10.55) 65(5.25,-10.55) 66(5.75,-10.55) 67(6.25,-10.55) 68(6.75,-10.55) 69(7.25,-10.55) 70(7.75,-10.55) 71(8.25,-10.55) 72(8.75,-10.55) 109(8.75,10.55) 110(8.25,10.55) 111(7.75,10.55) 112(7.25,10.55) 113(6.75,10.55) 114(6.25,10.55) 115(5.75,10.55) 116(5.25,10.55) 117(4.75,10.55) 118(4.25,10.55) 119(3.75,10.55) 120(3.25,10.55) 121(2.75,10.55) 122(2.25,10.55) 123(1.75,10.55) 124(1.25,10.55) 125(0.75,10.55) 126(0.25,10.55) 127(-0.25,10.55) 128(-0.75,10.55) 129(-1.25,10.55) 130(-1.75,10.55) 131(-2.25,10.55) 132(-2.75,10.55) 133(-3.25,10.55) 134(-3.75,10.55) 135(-4.25,10.55) 136(-4.75,10.55) 137(-5.25,10.55) 138(-5.75,10.55) 139(-6.25,10.55) 140(-6.75,10.55) 141(-7.25,10.55) 142(-7.75,10.55) 143(-8.25,10.55) 144(-8.75,10.55)
  silkscreen extent -10.67,-9.25 9.25,9.57, body extent -10,-10 10,10, height 1.6

## Part data
C1 C22 C25 C30 C101: library part "CAP 100nF 16V ±10% 0402 (1005 Metric) Thickness 0.6mm SMD"
C2 C5 C6 C7 C8 C9 C10 C11 C12 C13 C14 C15 C18 C21 C33 C34: library part "CAP 4.7uF 10V ±10% 0603 (1608 Metric) Thickness 0.55mm SMD"
C3 C4 C16 C17 C19 C20 C26 C27 C28 C29: library part "CAP 470nF 10V ±10% 0402 (1005 Metric) Thickness 0.6mm SMD"
C23 C24: library part CMP-0279-00001-1, "Capacitor, Tantalum, 10uF 10% 20V MCCT-B (3528)"
C31 C32 C38: library part CMP-1034-01875-1, "CAP 10nF 16V ±10% 0402 (1005 Metric) Thickness 0.33mm SMD"
C36: library part CMP-1034-02119-1, "CAP 1uF 16V ±10% 0402 (1005 Metric) Thickness 0.6mm SMD"
C37: library part CMP-1035-02762-1, "CAP 2.2uF 16V ±10% 0603 (1608 Metric) Thickness 0.55mm SMD"
C60: library part CMP-1034-02064-1, "CAP 100nF 10V ±5% 0402 (1005 Metric) Thickness 0.6mm SMD"
D1: "Fairchild S1G General Purpose Rectifier"
J1: "Header, 10-Pin, Dual row"
J5: "Header, 5-Pin, Dual row"
J6: "Header, 6-Pin"
J7 J8: "Header, 8-Pin"
J9: "Header, 10-Pin"
J10: "Header, 3-Pin, Dual row"
J11: library part POWER-CONNECTOR-3, "Connector, 3 Conductor Power Jack"
J12 J13 J14: "3-Way Jumper - Center Output"
J100: "Pad Array - 32 Pins 100X100mil spacing"
LED1: "SMD 0603 LED, GREEN"
R1 R3: library part "0402 (1005 Metric) 1/16 W 100R 1 Thick Film Chip Resistor"
R2 R5 R6 R7 R8 R14 R17 R18 R19 R20 R21: library part "0402 (1005 Metric) 1/16 W 4K7 1 Thick Film Chip Resistor"
R4: library part "0402 (1005 Metric) 1/16 W 1K 1 Thick Film Chip Resistor"
R9 R10 R11 R12 R13 R24 R26 R27 R29: library part "0402 (1005 Metric) 1/16 W 33R 1 Thick Film Chip Resistor"
R22: library part "0402 (1005 Metric) 1/16 W 330R 1 Thick Film Chip Resistor"
R70: library part CMP-1011-00369-1, "56R 0.063W 1% 0402 (1005 Metric)  SMD"
U1: library part CMP-0067-00454-1, "Spartan-6 LX 1.2V FPGA, 102 User I/Os, 144-Pin TQFP (0.5mm Pitch), Speed Grade 2, Commercial Grade, Pb-Free"
U2: "16-Mbit 3.0V Serial Flash Memory with Uniform 4 kB Sectors"
U3: library part CMP-0267-00001-1, "Low-Voltage 4-Bit 1-Of-2 FET Multiplexer/Demultiplexer, 16-pin SOP (DBQ16)"
U4: library part CMP-0062-01489-2, "1.5A Low Dropout Positive Regulators, 8-pin LLP, Pb-Free"
U5: library part CMP-0513-00111-1, "2 M High Speed Asynchronous CMOS SRAM, 128 K x 16, -40 to 85 degC, 48-Pin BGA (TF-BGA-48), Pb-Free"
U6: "AP2114, 1A Low Dropout Positive Fixed 3V3 Regulator"
U7: "Fixed Low Drop Positive Voltage Regulator, 1.2V 5-Pin TSOT-23, Tape and Reel"
U15: "IC BUFFER DUAL NON-INV SC706"
X2: library part "OSCILLATOR 20.0000MHZ SMD"

## Free pads (board coordinates)
  round 126 hole 126: 1(3600,2400)

## Via types
v1: diameter 16, hole 10, Top to Bottom, 176 vias
v2: diameter 28, hole 16, Top to Bottom, 10 vias
v3: diameter 15.94, hole 10, Top to Bottom, 8 vias
v4: diameter 19.68, hole 10, Top to Bottom, 4 vias
v5: diameter 50, hole 28, Top to Bottom, 3 vias

## Nets (pads, with @x,y where several pads share a name; then routed paths per layer and width w, separated by ;. In a path a pad name is that pad's centre, name@x,y a point inside that pad or via, vN(x,y) a via of type N, cw(c..) or ccw(c..) an arc to the next point about the centre after c; other vN are vias at no path point)
1V2: C6.1 C7.1 C15.1 C26.1 C37.2 J100.27 J100.28 U1.19 U1.28 U1.52 U1.89 U1.128 U7.5 | length 3945.3
  Top w10: v1(1746.88,2024.96) U1.128@1811.13,2024.96 ; U1.19@2236.85,1639.65 v1(2236.85,1688.59) ; U1.89@2255.7,2470.36 2256.22,2470.36 v1@2256.22,2534.3 ; v1(2384,1572) 2384.44,1571.56 C6.1@2414,1571.56 2414,1638.83 U1.28@2413.6,1639.24 ; v1(2578,2005) 2578.38,2005.38 U1.52@2641.94,2005.38
  Bottom w10: C7.1@2537.56,2005 v1(2578,2005)
  Bottom w20: J100.27@1422,1676 J100.28@1522,1676 1664,1676 ; 1666,2024.56 C15.1@1707,2024.56 ; C15.1@1713.6,2024.96 v1(1746.88,2024.96) ; v1(2236.85,1688.59) 2236.85,1543 ; v1(2256.22,2536.25) 2256.22,2551.78 2241,2567 1780,2567 1735,2522 1735,2384 1664,2313 1664,1676 ; v1(2384,1572) 2384.04,1543 ; C37.2@2435.56,1400.4 U7.5@2508.79,1400.4 ; C37.2@2435.56,1402 2443,1409.44 2443,1496 2417,1522 2417,1543 ; C7.1@2537.56,2005 2537.56,1680.56 2511,1654 2442,1654 2417,1629 2417,1543 ; 1664,1676 1664,1644 1801.11,1506.89 2076.89,1506.89 2113,1543 2236.85,1543 ; 2236.85,1543 2384.04,1543 ; 2384.04,1543 2417,1543
3V3: C1.1 C2.1 C3.2 C4.2 C5.1 C8.1 C9.1 C10.1 C11.1 C12.1 C13.1 C14.2 C16.2 C17.2 C18.2 C19.2 C20.2 C21.2 C22.1 C25.1 C27.1 C28.2 C29.2 C30.1 C31.1 C32.1 C34.1 C36.2 C60.2 C101.1 J1.2 J5.9 J100.31 J100.32 R1.2 R2.2 R5.2 R6.2 R7.2 R8.2 R17.2 R18.2 R19.2 R20.2 R21.2 R22.2 U1.4 U1.18 U1.20 U1.31 U1.36 U1.42 U1.53 U1.63 U1.76 U1.86 U1.90 U1.103 U1.122 U1.125 U1.129 U1.135 U2.8 U3.16 U5.D6 U5.E1 U6.2 U6.4 U7.1 U7.3 U15.5 X2.4 | length 3977.7
  Top w5: U1.90@2236.02,2469.53 U1.90@2236.12,2469.63 ; v3(2567,2222) 2567.09,2221.91 U1.63@2641.94,2221.91 ; U1.63@2641.94,2222.54 U1.63@2642.15,2222.54
  Top w10: v1(1246,2504) R17.2@1246,2525.28 ; v1(1326,2504) R18.2@1326,2525.28 ; v1(1406,2503.72) R19.2@1406,2525 ; v1(1487,2504.72) R20.2@1487,2526 ; v3(1762,1888) 1762.73,1887.27 U1.135@1811.24,1887.27 ; v3(1761.98,2005.06) U1.129@1810.92,2005.06 ; v3(1761.98,2083.8) U1.125@1810.92,2083.8 ; v3(1762.3,2143.17) U1.122@1811.24,2143.17 ; C20.2@1939,1564.75 1941.16,1566.91 U1.4@1941.16,1639.24 ; C20.2@1940.19,1563.56 C13.1@1985,1563.56 v1(2015.44,1563.56) ; v3(1980,2422) 1980,2469.42 U1.103@1980.53,2469.95 ; v1(2157,1572) 2157.44,1571.56 C8.1@2187,1571.56 ; U1.18@2216.75,1639.24 2216.75,1588.25 2230,1575 2243.02,1575 2256.02,1588 U1.20@2256.02,1639.13 ; U1.90@2236,2469.54 v3(2236,2518) ; v3(2315.07,2405.59) U1.86@2315.07,2469.84 ; C19.2@2472.65,1581.09 U1.31@2472.65,1639.24 ; v1(2506.56,2571.56) C12.1@2506.56,2539 2512.02,2533.54 U1.76@2512.02,2469.95 ; 2561.25,1575 2571.08,1584.83 U1.36@2571.08,1639.24 ; U1.42@2641.94,1808.53 C29.2@2713.25,1808.53 ; U1.53@2641.94,2025.06 2680.94,2025.06 2695.87,2010.13 2706.13,2010.13 C16.2@2714,2002.25 ; C29.2@2712.72,1808.53 C29.2@2713.25,1808 ; R21.2@2747.72,1703 v1(2769,1703) ; R5.2@2747.72,1750 v1(2769,1750) ; R22.2@2753.43,2426 v1(2775.72,2426) ; R1.2@2754.72,2387 v1(2777,2387) ; v1(3000,1948) C1.1@3027.25,1948 3027.69,1948.43 U2.8@3027.69,2011 ; U3.16@3032.64,2252.5 3032.75,2252.39 C22.1@3032.75,2222
  Top w20: C8.1@2187,1571.56 C21.2@2236,1571.56 ; C19.2@2468,1574.75 C10.1@2518.81,1574.75 ; v1(2496.44,1551.56) 2522,1551.56 ; v1(2547.56,1551.56) 2522,1551.56 ; C28.2@2579,1574.75 C10.1@2518.81,1574.75 ; C29.2@2713.25,1808.53 2713.25,1845.81 C2.1@2716.44,1849 v1(2716.44,1878.89) ; C16.2@2714,2002.25 2714,2040.56 2719.49,2042.32 v1(2719.49,2071.76) ; C22.1@3032.75,2222 v1(3063,2222) ; C10.1@2518.81,1574.75 C10.1@2522,1571.56 2522,1551.56
  Bottom w5: v3(2567,2222) 2639.25,2222 C17.2@2642,2224.75
  Bottom w10: v3(1762,1888) 1810.25,1888 C9.1@1815.25,1893 ; v3(1761.98,2005.06) 1809.32,2005.06 C11.1@1815.25,2011 ; v1(2033.18,2096.18) 2033.18,2070.93 2068.18,2070.93 2071.52,2067.59 v1(2138.59,2067.59) ; v1@2138.76,2068.76 U5.E1@2152.65,2068.76 ; U5.D6@2300.29,2039.24 v1@2314.24,2039.24 ; v1(2314.59,2040.59) 2381.66,2040.59 C32.1@2385,2037.25 ; v3@2314.74,2405.93 C3.2@2314.74,2470.48 ; C32.1@2385,2039.75 C25.1@2420,2039.75 v1(2445.25,2039.75) ; v1@2555,2282 2556,2283 R2.2@2556,2305.28 ; R6.2@2571,1695.28 2593.28,1695.28 v1(2593,1695) ; U15.5@2630.91,2625 2630.91,2652.56 C60.2@2659.45,2681.1 v1(2685.04,2681.1) ; v1(3086,2039) 3087.28,2040.28 R8.2@3105,2040.28 ; R7.2@3161,2040.28 3177.72,2040.28 v1(3179,2039)
  Bottom w13: C5.1@2236,2484 v3(2236,2518) ; v3@2314.74,2405.93 v3(2315.07,2405.59) ; C3.2@2314.74,2470.48 C3.2@2315.25,2471
  Bottom w15: U7.3@2607.21,1325.6 2650.6,1325.6 2660,1335 2660,1391 2650.6,1400.4 U7.1@2607.21,1400.4 ; C17.2@2642,2224.75 2645,2221.75 v1@2691,2221.75 ; 2658,1393 C36.2@2686.25,1393
  Bottom w20: v3(1761.98,2083.8) 1761.98,2114 ; v3@1761.98,2142.86 1761.98,2114 ; C9.1@1815.25,1893 v1(1862,1893) ; C11.1@1815.25,2011 v1(1862,2011) ; v1@1897.44,2125.56 C14.2@1870,2125.56 1857,2125.56 1844.19,2112.75 C27.1@1827,2112.75 1763.24,2112.75 1761.98,2114 ; v3(1980,2422) C4.2@1980,2473.35 v1(1980,2517) ; v1(2236,2425) C5.1@2236,2484 ; C3.2@2315.25,2471 v1(2315.25,2514.65) ; X2.4@2399.69,2266.21 2399.69,2278.44 C101.1@2462.25,2341 v1(2462.25,2361.75) ; C36.2@2687,1395.25 v1(2687,1456)
  Bottom w30: v1(2687,1456) C34.1@2733.44,1456 2733.44,1606.58 U6.4@2744.86,1618
  Bottom w50: U6.4@2744.86,1618 U6.2@2977.14,1618
  other v1: 2688,1412.19 2708.44,1456 1900,2127 2691,2222 2556,2281
5V0: C33.1 J1.1 J12.2 J100.25 J100.26 U6.3 | length 2752
  Top w30: J1.1@1220.47,1320.9 1147,1320.9 1145,1318.9 ; J100.26@1322,1676 1184,1676 1145,1637 1145,1318.9 ; J12.2@2867,1375 2867,1291 2784,1208 1199,1208 1145,1262 1145,1318.9
  Bottom w30: J12.2@2867,1375 2867,1455.56 C33.1@2867.44,1456 2867.44,1497.44 2897.45,1527.45 U6.3@2977.14,1527.45
5V0_ARD: J7.5 J12.3 | length 1008.2
  Bottom w50: J7.5@1950,1100 1950,1175 1984,1209 2658,1209 2767,1318 J12.3@2767,1375
5V0_REG: C23.1 J12.1 U4.6 U4.7 U4.8 U4.9 | length 463.5
  Bottom w50: J12.1@2967,1375 2967,1297 3029.99,1234.01 C23.1@3138,1234.01 3246,1234.01 ; 3246.55,1234.56 v4(3327,1234.56)
  other v4: 3327,1179.44 3307.32,1207 3346.68,1207
#HARD_TCK: R24.2 U1.109 | length 676.4
  Top w6.69: R24.2@1206,2525.28 1206,2493 1265.93,2433.07 1722.77,2433.07 1756.77,2399.08 U1.109@1811.24,2399.08
#HARD_TDI: R26.2 U1.110 | length 732.9
  Top w6.69: R26.2@1286,2525.28 1286,2493 1326.24,2452.76 1821.85,2452.76 1867,2407.61 1867,2391 1855.39,2379.39 U1.110@1811.24,2379.39
  Top w10: R26.2@1279,2526.47 R26.2@1284,2521.47
#HARD_TDO: R27.2 U1.106 | length 662.3
  Top w6.69: R27.2@1366,2525 1366,2488 1385.5,2468.5 1825.79,2468.5 1875.98,2418.31 1903.31,2418.31 1921.47,2436.47 U1.106@1921.47,2469.95
#HARD_TMS: R29.2 U1.107 | length 562.8
  Top w6.69: R29.2@1447,2526 1447,2490 1452.75,2484.25 1704.25,2484.25 1748,2528 1885.79,2528 1901.79,2512 U1.107@1901.79,2469.95
  Top w10: R29.2@1445,2524 R29.2@1447,2526
#SOFT_TCK: R10.2 U1.112 | length 1299.1
  Top w6.69: R10.2@1287,2847.72 1287,2862 1274,2875 1137,2875 1114,2852 1114,2531.67 1244.09,2401.57 1686.02,2401.57 1747.57,2340.02 U1.112@1811.24,2340.02
#SOFT_TDI: R11.2 U1.114 | length 1483
  Top w6.69: R11.2@1387,2847.72 1387,2873 1368.27,2891.73 1122.73,2891.73 1095.65,2864.65 1095.65,2526.39 1236.22,2385.83 1677.17,2385.83 1762.34,2300.65 U1.114@1811.24,2300.65
#SOFT_TDO: R12.2 U1.115 | length 1660.2
  Top w6.69: R12.2@1487,2847.72 1487,2887 1463,2911 1113.76,2911 1078.74,2875.98 1078.74,2518.7 1227.36,2370.08 1665.35,2370.08 1754.46,2280.97 U1.115@1811.24,2280.97
#SOFT_TMS: R9.2 U1.111 | length 1116.3
  Top w6.69: R9.2@1187,2847.72 1136.72,2847.72 1131,2842 1131,2538.29 1251.97,2417.32 1698.82,2417.32 1756.43,2359.71 U1.111@1811.24,2359.71
ARD_A0: J6.1
ARD_A1: J6.2
ARD_A2: J6.3
ARD_A3: J6.4
ARD_A4: J6.5
ARD_A5: J6.6
ARD_AREF: J9.8
ARD_D0(RX): J8.1 U1.55 | length 1109.4
  Top w7: U1.55@2641.94,2064.43 2678.11,2064.43 2707.18,2093.5 2750,2093.5 2903.14,2246.65 2903.14,2754.52 2950,2801.38 J8.1@2950,3000
ARD_D1(TX): J8.2 U1.57 | length 1075.2
  Top w7: U1.57@2641.94,2103.8 2644.04,2105.9 2744.87,2105.9 2890.75,2251.78 2890.75,2756.89 2850,2797.64 J8.2@2850,3000
ARD_D3: J8.4 U1.59 | length 1098.5
  Top w7: U1.59@2641.94,2143.17 2747.09,2143.17 2863.41,2259.5 2863.41,2742.51 2660.85,2945.07 2660.85,2989.15 J8.4@2650,3000
ARD_D4: J8.5 U1.61 | length 1165.5
  Top w7: J8.5@2550,3000 2550,2932 2570,2912 2676.39,2912 2851.02,2737.38 2851.02,2264.63 2768.93,2182.54 U1.61@2641.94,2182.54
ARD_D5: J8.6 U1.62 | length 1234.1
  Top w7: J8.6@2450,3000 2450,2919 2472,2897 2673.87,2897 2838.62,2732.24 2838.62,2269.76 2771.09,2202.23 U1.62@2641.94,2202.23
ARD_D6: J8.7 U1.64 | length 1288.3
  Top w7: J8.7@2350,3000 2350,2915 2385,2880 2672.17,2880 2825.79,2726.38 2825.79,2274.46 2793.33,2242 2642.35,2242 U1.64@2641.94,2241.6
ARD_D7: J8.8 J14.2 | length 821.9
  Top w7: J8.8@2250,3000 2250,2901 2285.84,2865.16 2664.37,2865.16 2703.74,2825.79 2703.74,2646.26 J14.2@2745.08,2604.92
ARD_D8: J9.1 U1.74 | length 945.5
  Top w10: J9.1@2090,3000 2090,2663.94 2119.09,2634.84 2501.97,2634.84 2551.39,2585.42 U1.74@2551.39,2469.95
ARD_D11: J9.4 U1.102 | length 637.2
  Top w10: J9.4@1790,3000 1790,2912 1819,2883 1853.22,2883 2000.21,2736.01 U1.102@2000.21,2469.95
ARD_D12: J9.5 U1.104 | length 714.7
  Top w10: J9.5@1690,3000 1690,2896 1725.76,2860.24 1849.41,2860.24 1960.84,2748.8 U1.104@1960.84,2469.95
ARD_D13: J9.6 U1.105 | length 797.4
  Top w10: J9.6@1590,3000 1590,2888 1635.48,2842.52 1843.5,2842.52 1941.16,2744.87 U1.105@1941.16,2469.95
ARD_IOREF: J7.2
ARD_RESET: J7.3
CCLK: R1.1 R3.2 U1.70 U3.11 | length 547.5
  Top w10: U1.70@2641.94,2359.71 2718.71,2359.71 v1(2720,2361) ; R3.2@2718.28,2336 2720,2337.72 v1(2720,2361) ; R1.1@2719.28,2387 2720,2386.28 v1(2720,2361) ; U3.11@3032.64,2377.5 v1@3081.5,2377.5
  Bottom w10: v1(2720,2361) 2967,2361 2984,2378 v1(3081,2378)
CS_ARD_ALT_N: J9.2 J13.3 U1.75 | length 2517.3
  Top w10: J9.2@1990,3000 1989.17,2999.17 1989.17,2900.59 2040.35,2849.41 2040.35,2654.53 2081.69,2613.19 2494.31,2613.19 2531.71,2575.79 U1.75@2531.71,2469.95
  Bottom w10: J9.2@1990,3000 1990,2899 2066.17,2822.83 3109.45,2822.83 3232.48,2699.8 J13.3@3232.48,2605.32
CS_ARD_N: J13.2 U1.48 U3.13 | length 1108.1
  Top w7: v1(2578.01,1926.95) U1.48@2642.26,1926.95 ; U1.48@2641.94,1926.64 2790.81,1926.64 2934.61,2070.43 2934.61,2144.68 ; 2935,2144.68 2935,2173 2959,2197 2959,2302 2984.5,2327.5 U3.13@3032.64,2327.5 3112.5,2327.5 3132.48,2347.48 J13.2@3132.48,2605.32
CS_ARD_STD_N: J9.3 J13.1 U1.101 | length 2012
  Top w10: J9.3@1890,3000 1890,2880 1974.61,2795.39 1974.61,2794.96 2019.9,2749.67 U1.101@2019.9,2469.95
  Bottom w10: J9.3@1890,3000 1890,2886 1971.87,2804.13 2928.15,2804.13 3032.48,2699.8 J13.1@3032.48,2605.32
CS_FL_N: U2.1 U3.12 | length 862.5
  Top w10: v1(2939,2243) 2939,2333 2958.5,2352.5 U3.12@3032.64,2352.5 v1@3081.5,2352.5 ; U2.1@3238.32,2011 v1(3293,2011)
  Bottom w10: v1(2939,2243) 2939,2043 2971,2011 v1(3293,2011)
  other v1: 3081,2353
CSO_B_FPGA: R6.1 U1.38 U3.14 | length 1345.4
  Top w5: v1(2588,2301) 2523,2301 2494,2272 2494,1765 2529.21,1729.79 U1.38@2641.94,1729.79
  Top w10: U3.14@3032.64,2302.5 v1@3081.5,2302.5
  Bottom w5: R6.1@2571,1730.72 2571.28,1731 v1(2598,1731)
  Bottom w6.69: v1@2589,2302 v1@3080,2302
  Bottom w10: v1(2588,2301) v1@2589,2302 ; v1@3080,2302 v1(3081,2303)
DONE: LED1.1 R22.1 U1.71 U15.1 U15.3 | length 632.1
  Top w10: LED1.1@2507.87,2680.12 2507.87,2656.5 2571.85,2592.52 v1(2571.85,2571.85) ; U1.71@2642.83,2380.28 2686.28,2380.28 2694,2388 2694,2418 2702,2426 R22.1@2718,2426 2718,2450.31 v1(2717.52,2450.79)
  Bottom w10: v1(2571.85,2571.85) 2600.39,2571.85 2605.32,2566.93 U15.3@2605.32,2562.01 2605.32,2501.97 ; U15.1@2656.5,2562.01 2656.5,2506.89 2651.57,2501.97 2605.32,2501.97 ; v1(2717.52,2450.79) 2625,2450.79 2605.32,2470.47 2605.32,2501.97
DONE#_ARD_D7: J14.3 U1.67 | length 621.8
  Top w7: U1.67@2641.94,2300.65 2785.89,2300.65 2813.39,2328.16 2813.39,2694.48 2802.95,2704.92 J14.3@2745.08,2704.92
DONE_ARD: J14.1 U15.6 | length 206.4
  Bottom w10: U15.6@2656.5,2625 2679.13,2625 2683.07,2621.06 2683.07,2504.92 J14.1@2745.08,2504.92
DONE_TP: TP1.1 U15.4 | length 127.6
  Bottom w10: TP1.1@2577.76,2741.14 2577.76,2695.87 2605.32,2668.31 U15.4@2605.32,2625
EXT_PWR: C24.1 D1.2 U4.2 | length 227.9
  Bottom w10: U4.2@3391.96,1222.75 3415.75,1222.75
  Bottom w30: D1.2@3396.47,1366 3396.47,1313.53 3408,1302 3450.01,1302 C24.1@3516,1236.01
EXT_PWR#: D1.1 J11.1 | length 225.8
  Bottom w50: D1.1@3255.53,1366 3255.53,1499.69 J11.1@3320.63,1564.79
FPGA_CLK: R13.1 U1.56 | length 89.5
  Top w10: v1(2578.01,2084.43) 2641.63,2084.43 U1.56@2641.94,2084.12
  Bottom w10: R13.1@2552.72,2084 2577.57,2084 v1(2578.01,2084.43)